# EAGLE board twiigs (EAGLE 7.5.0)
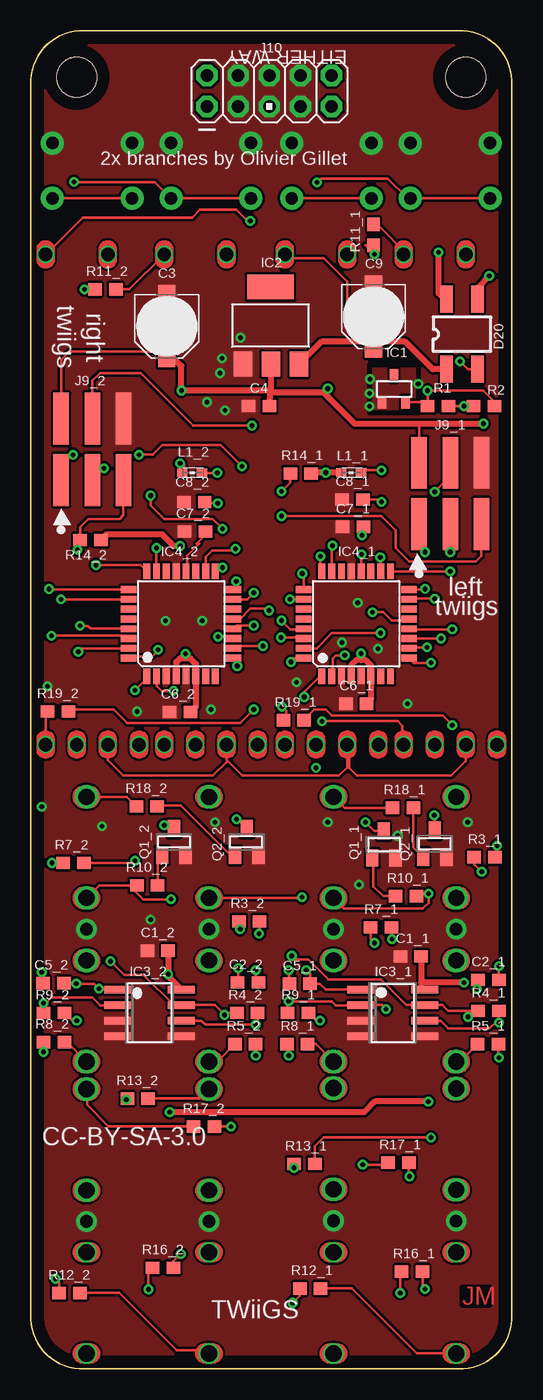
[diagram p0: board, top side]
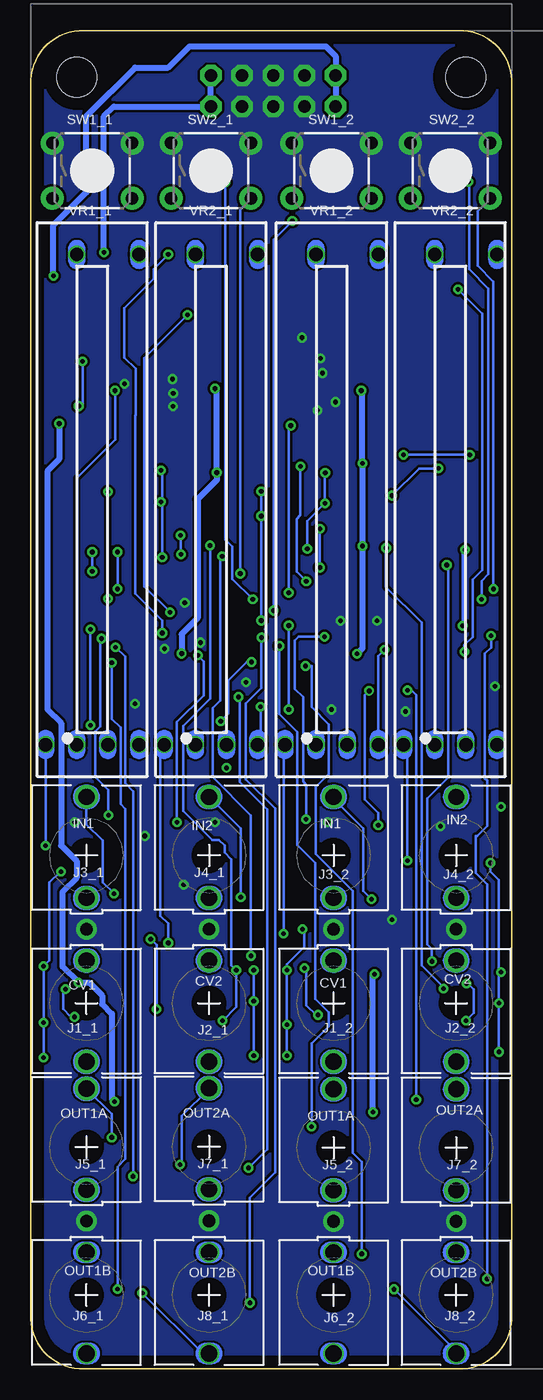
[diagram p1: board, bottom side, seen from below]

Size 39.27 x 109.22 mm. Coordinates in mm from the lower left corner, seen from the top.
Outline: 0,4.45 arc94 4.39,0 34.87,0 arc94 39.27,4.45 39.27,104.78 arc94 34.87,109.22 4.39,109.22 arc94 0,104.78 0,4.45
Copper layers (1*16): Top 0.035mm / dielectric 1.5mm / Bottom 0.035mm
Design rules "default *": minimum track width 10mil, minimum drill 0.61mm, track to track 8mil, track to pad 8mil, pad to pad 8mil, via to via 8mil, smd to smd 8mil, copper to edge 40mil, drill to drill 8mil, minimum pad ring 0mil, minimum via ring 8mil, stop-mask expansion 4mil, vias tented up to drill 15mil, thermal gap 10mil
Net classes: 0 default: width 0.203 mm, drill 0.3 mm, clearance 0.152 mm, clearance 0.152 mm to class 1, clearance 0.152 mm to class 2; 1 hipriority: width 0.203 mm, drill 0.3 mm, clearance 0.152 mm, clearance 0.152 mm to class 0, clearance 0.152 mm to class 2; 2 powa: width 0.381 mm, drill 0.3 mm, clearance 0.152 mm, clearance 0.152 mm to class 0, clearance 0.152 mm to class 1
Holes 3.25 mm at 3.76,105.41 35.51,105.41

## Footprints (pad centres in the part's own frame; a part is rotated, then mirrored left to right if it is on the bottom)
CAP_0603_C1_1 = smd 1.1 x 1: 1 -0.85,0; 2 0.85,0
CAP_0603_C1_2 = smd 1.1 x 1: 1 -0.85,0; 2 0.85,0
CAP_0603_C2_1 = smd 1.1 x 1: 1 -0.85,0; 2 0.85,0
CAP_0603_C2_2 = smd 1.1 x 1: 1 -0.85,0; 2 0.85,0
PANASONIC_C = smd 2.6 x 1.4: + 2.05,0; - -2.05,0
CAP_0603 = smd 1.1 x 1: 1 -0.85,0; 2 0.85,0
CAP_0603_C5_1 = smd 1.1 x 1: 1 -0.85,0; 2 0.85,0
CAP_0603_C5_2 = smd 1.1 x 1: 1 -0.85,0; 2 0.85,0
CAP_0603_C6_1 = smd 1.1 x 1: 1 -0.85,0; 2 0.85,0
CAP_0603_C6_2 = smd 1.1 x 1: 1 -0.85,0; 2 0.85,0
CAP_0603_C7_1 = smd 1.1 x 1: 1 -0.85,0; 2 0.85,0
CAP_0603_C7_2 = smd 1.1 x 1: 1 -0.85,0; 2 0.85,0
CAP_0603_C8_1 = smd 1.1 x 1: 1 -0.85,0; 2 0.85,0
CAP_0603_C8_2 = smd 1.1 x 1: 1 -0.85,0; 2 0.85,0
PANASONIC_C_C9 = smd 2.6 x 1.4: + 2.05,0; - -2.05,0
SOP-4/6.5x2.54 = smd 2.2 x 1: 1 -2.855,1.27; 2 -2.855,-1.27; 3 2.855,-1.27; 4 2.855,1.27
DBZ_R-PDSO-G3 = smd 0.7 x 1: 1 -0.95,-1.1; 2 0.95,-1.1; 3 0,1.1
SOT223 = smd 1.499 x 2.007: 1 -2.261,-3.15; 2 0.025,-3.15; 3 2.311,-3.15 | smd 3.81 x 2.007: 4 0,3.15
SO08 = smd 0.6 x 2.2: 1 -1.905,-2.6; 2 -0.635,-2.6; 3 0.635,-2.6; 4 1.905,-2.6; 5 1.905,2.6; 6 0.635,2.6; 7 -0.635,2.6; 8 -1.905,2.6
SO08_IC3_2 = smd 0.6 x 2.2: 1 -1.905,-2.6; 2 -0.635,-2.6; 3 0.635,-2.6; 4 1.905,-2.6; 5 1.905,2.6; 6 0.635,2.6; 7 -0.635,2.6; 8 -1.905,2.6
TQFP32-08 = smd 1.27 x 0.559: 1 -4.293,2.8; 2 -4.293,2; 3 -4.293,1.2; 4 -4.293,0.4; 5 -4.293,-0.4; 6 -4.293,-1.2; 7 -4.293,-2; 8 -4.293,-2.8; 17 4.293,-2.8; 18 4.293,-2; 19 4.293,-1.2; 20 4.293,-0.4; 21 4.293,0.4; 22 4.293,1.2; 23 4.293,2; 24 4.293,2.8 | smd 0.559 x 1.27: 9 -2.8,-4.293; 10 -2,-4.293; 11 -1.2,-4.293; 12 -0.4,-4.293; 13 0.4,-4.293; 14 1.2,-4.293; 15 2,-4.293; 16 2.8,-4.293; 25 2.8,4.293; 26 2,4.293; 27 1.2,4.293; 28 0.4,4.293; 29 -0.4,4.293; 30 -1.2,4.293; 31 -2,4.293; 32 -2.8,4.293
TQFP32-08_IC4_2 = smd 1.27 x 0.559: 1 -4.293,2.8; 2 -4.293,2; 3 -4.293,1.2; 4 -4.293,0.4; 5 -4.293,-0.4; 6 -4.293,-1.2; 7 -4.293,-2; 8 -4.293,-2.8; 17 4.293,-2.8; 18 4.293,-2; 19 4.293,-1.2; 20 4.293,-0.4; 21 4.293,0.4; 22 4.293,1.2; 23 4.293,2; 24 4.293,2.8 | smd 0.559 x 1.27: 9 -2.8,-4.293; 10 -2,-4.293; 11 -1.2,-4.293; 12 -0.4,-4.293; 13 0.4,-4.293; 14 1.2,-4.293; 15 2,-4.293; 16 2.8,-4.293; 25 2.8,4.293; 26 2,4.293; 27 1.2,4.293; 28 0.4,4.293; 29 -0.4,4.293; 30 -1.2,4.293; 31 -2,4.293; 32 -2.8,4.293
Thonkiconn = drill 1.321 pad 1.905: 1 0,3.48; 2 0,-4.775 | drill 1.016 pad 1.651: 3 0,6.02
Thonkiconn_J1_2 = drill 1.321 pad 1.905: 1 0,3.48; 2 0,-4.775 | drill 1.016 pad 1.651: 3 0,6.02
Thonkiconn_J2_1 = drill 1.321 pad 1.905: 1 0,3.48; 2 0,-4.775 | drill 1.016 pad 1.651: 3 0,6.02
Thonkiconn_J2_2 = drill 1.321 pad 1.905: 1 0,3.48; 2 0,-4.775 | drill 1.016 pad 1.651: 3 0,6.02
Thonkiconn_J3_1 = drill 1.321 pad 1.905: 1 0,3.48; 2 0,-4.775 | drill 1.016 pad 1.651: 3 0,6.02
Thonkiconn_J3_2 = drill 1.321 pad 1.905: 1 0,3.48; 2 0,-4.775 | drill 1.016 pad 1.651: 3 0,6.02
Thonkiconn_J4_1 = drill 1.321 pad 1.905: 1 0,3.48; 2 0,-4.775 | drill 1.016 pad 1.651: 3 0,6.02
Thonkiconn_J4_2 = drill 1.321 pad 1.905: 1 0,3.48; 2 0,-4.775 | drill 1.016 pad 1.651: 3 0,6.02
Thonkiconn_J5_1 = drill 1.321 pad 1.905: 1 0,3.48; 2 0,-4.775 | drill 1.016 pad 1.651: 3 0,6.02
Thonkiconn_J5_2 = drill 1.321 pad 1.905: 1 0,3.48; 2 0,-4.775 | drill 1.016 pad 1.651: 3 0,6.02
Thonkiconn_J6_1 = drill 1.321 pad 1.651: 1 0,3.48; 2 0,-4.775 | drill 1.016 pad 1.651: 3 0,6.02
Thonkiconn_J6_2 = drill 1.321 pad 1.651: 1 0,3.48; 2 0,-4.775 | drill 1.016 pad 1.651: 3 0,6.02
Thonkiconn_J7_1 = drill 1.321 pad 1.905: 1 0,3.48; 2 0,-4.775 | drill 1.016 pad 1.651: 3 0,6.02
Thonkiconn_J7_2 = drill 1.321 pad 1.905: 1 0,3.48; 2 0,-4.775 | drill 1.016 pad 1.651: 3 0,6.02
Thonkiconn_J8_1 = drill 1.321 pad 1.651: 1 0,3.48; 2 0,-4.775 | drill 1.016 pad 1.651: 3 0,6.02
Thonkiconn_J8_2 = drill 1.321 pad 1.651: 1 0,3.48; 2 0,-4.775 | drill 1.016 pad 1.651: 3 0,6.02
HDR-2x3S/2.54x2.54/Sh15x11 = smd 1.27 x 4.24: 1 -2.54,-2.505; 2 -2.54,2.505; 3 0,-2.505; 4 0,2.505; 5 2.54,-2.505; 6 2.54,2.505
HDR-2x3S/2.54x2.54/Sh15x11_J9_2 = smd 1.27 x 4.24: 1 -2.54,-2.505; 2 -2.54,2.505; 3 0,-2.505; 4 0,2.505; 5 2.54,-2.505; 6 2.54,2.505
AVR_ICSP = drill 1.016 pad 1.737 octagon: 1 -1.27,5.08; 2 1.27,5.08; 3 -1.27,2.54; 4 1.27,2.54; 5 -1.27,0; 6 1.27,0; 7 -1.27,-2.54; 8 1.27,-2.54; 9 -1.27,-5.08; 10 1.27,-5.08
0603 = smd 0.85 x 0.7: 1 -0.9,0; 2 0.7,0
0603_L1_2 = smd 0.85 x 0.7: 1 -0.9,0; 2 0.7,0
SOT23-BEC = smd 1 x 1.4: B -0.95,-1.1; C 0,1.1; E 0.95,-1.1
SOT23-BEC_Q1_2 = smd 1 x 1.4: B -0.95,-1.1; C 0,1.1; E 0.95,-1.1
SOT23-BEC_Q2_1 = smd 1 x 1.4: B -0.95,-1.1; C 0,1.1; E 0.95,-1.1
SOT23-BEC_Q2_2 = smd 1 x 1.4: B -0.95,-1.1; C 0,1.1; E 0.95,-1.1
RES_0603 = smd 1.1 x 1: 1 -0.85,0; 2 0.85,0
RES_0603_R2 = smd 1.1 x 1: 1 -0.85,0; 2 0.85,0
RES_0603_R3_1 = smd 1.1 x 1: 1 -0.85,0; 2 0.85,0
RES_0603_R3_2 = smd 1.1 x 1: 1 -0.85,0; 2 0.85,0
RES_0603_R4_1 = smd 1.1 x 1: 1 -0.85,0; 2 0.85,0
RES_0603_R4_2 = smd 1.1 x 1: 1 -0.85,0; 2 0.85,0
RES_0603_R5_1 = smd 1.1 x 1: 1 -0.85,0; 2 0.85,0
RES_0603_R5_2 = smd 1.1 x 1: 1 -0.85,0; 2 0.85,0
RES_0603_R7_1 = smd 1.1 x 1: 1 -0.85,0; 2 0.85,0
RES_0603_R7_2 = smd 1.1 x 1: 1 -0.85,0; 2 0.85,0
RES_0603_R8_1 = smd 1.1 x 1: 1 -0.85,0; 2 0.85,0
RES_0603_R8_2 = smd 1.1 x 1: 1 -0.85,0; 2 0.85,0
RES_0603_R9_1 = smd 1.1 x 1: 1 -0.85,0; 2 0.85,0
RES_0603_R9_2 = smd 1.1 x 1: 1 -0.85,0; 2 0.85,0
RES_0603_R10_1 = smd 1.1 x 1: 1 -0.85,0; 2 0.85,0
RES_0603_R10_2 = smd 1.1 x 1: 1 -0.85,0; 2 0.85,0
RES_0603_R11_1 = smd 1.1 x 1: 1 -0.85,0; 2 0.85,0
RES_0603_R11_2 = smd 1.1 x 1: 1 -0.85,0; 2 0.85,0
RES_0603_R12_1 = smd 1.1 x 1: 1 -0.85,0; 2 0.85,0
RES_0603_R12_2 = smd 1.1 x 1: 1 -0.85,0; 2 0.85,0
RES_0603_R13_1 = smd 1.1 x 1: 1 -0.85,0; 2 0.85,0
RES_0603_R13_2 = smd 1.1 x 1: 1 -0.85,0; 2 0.85,0
RES_0603_R14_1 = smd 1.1 x 1: 1 -0.85,0; 2 0.85,0
RES_0603_R14_2 = smd 1.1 x 1: 1 -0.85,0; 2 0.85,0
RES_0603_R16_1 = smd 1.1 x 1: 1 -0.85,0; 2 0.85,0
RES_0603_R16_2 = smd 1.1 x 1: 1 -0.85,0; 2 0.85,0
RES_0603_R17_1 = smd 1.1 x 1: 1 -0.85,0; 2 0.85,0
RES_0603_R17_2 = smd 1.1 x 1: 1 -0.85,0; 2 0.85,0
RES_0603_R18_1 = smd 1.1 x 1: 1 -0.85,0; 2 0.85,0
RES_0603_R18_2 = smd 1.1 x 1: 1 -0.85,0; 2 0.85,0
RES_0603_R19_1 = smd 1.1 x 1: 1 -0.85,0; 2 0.85,0
RES_0603_R19_2 = smd 1.1 x 1: 1 -0.85,0; 2 0.85,0
TACTILE-PTH = drill 1.016 pad 1.88: 1 -3.251,2.261; 2 3.251,2.261; 3 -3.251,-2.261; 4 3.251,-2.261
TACTILE-PTH_SW1_2 = drill 1.016 pad 1.88: 1 -3.251,2.261; 2 3.251,2.261; 3 -3.251,-2.261; 4 3.251,-2.261
TACTILE-PTH_SW2_1 = drill 1.016 pad 1.88: 1 -3.251,2.261; 2 3.251,2.261; 3 -3.251,-2.261; 4 3.251,-2.261
TACTILE-PTH_SW2_2 = drill 1.016 pad 1.88: 1 -3.251,2.261; 2 3.251,2.261; 3 -3.251,-2.261; 4 3.251,-2.261
BOURNS_PTL_30mm = drill 1.092 pad 1.397: 1 -20,1.27; 2 -20,3.81; 3 20,1.27; 4 -20,-1.27; 5 20,-3.81; 6 -20,-3.81
BOURNS_PTL_30mm_VR1_2 = drill 1.092 pad 1.397: 1 -20,1.27; 2 -20,3.81; 3 20,1.27; 4 -20,-1.27; 5 20,-3.81; 6 -20,-3.81
BOURNS_PTL_30mm_VR2_1 = drill 1.092 pad 1.397: 1 -20,1.27; 2 -20,3.81; 3 20,1.27; 4 -20,-1.27; 5 20,-3.81; 6 -20,-3.81
BOURNS_PTL_30mm_VR2_2 = drill 1.092 pad 1.397: 1 -20,1.27; 2 -20,3.81; 3 20,1.27; 4 -20,-1.27; 5 20,-3.81; 6 -20,-3.81

## Placement (x,y rotation side)
C1_1  100n  [CAP_0603_C1_1]  31.01,33.66 180 top
C1_2  100n  [CAP_0603_C1_2]  10.37,34.13 180 top
C2_1  1n  [CAP_0603_C2_1]  37.36,31.75 180 top
C2_2  1n  [CAP_0603_C2_2]  17.73,31.54 180 top
C3  22u  [PANASONIC_C]  11.11,85.09 270 top
C4  100n  [CAP_0603]  18.63,78.57 180 top
C5_1  1n  [CAP_0603_C5_1]  21.96,31.43 0 top
C5_2  1n  [CAP_0603_C5_2]  1.85,31.49 0 top
C6_1  100n  [CAP_0603_C6_1]  26.56,54.29 180 top
C6_2  100n  [CAP_0603_C6_2]  12.17,53.6 180 top
C7_1  100n  [CAP_0603_C7_1]  26.3,68.72 180 top
C7_2  100n  [CAP_0603_C7_2]  13.42,68.34 180 top
C8_1  100n  [CAP_0603_C8_1]  26.26,70.96 180 top
C8_2  100n  [CAP_0603_C8_2]  13.35,70.74 180 top
C9  22u  [PANASONIC_C_C9]  27.98,85.88 270 top
D20  MB1S  [SOP-4/6.5x2.54]  35.19,84.44 90 top
IC1  LM4040 5.0V  [DBZ_R-PDSO-G3]  29.63,79.99 0 top
IC2  LM1117-5.0  [SOT223]  19.57,85.15 0 top
IC3_1  MCP6002  [SO08]  29.54,29.05 270 top
IC3_2  MCP6002  [SO08_IC3_2]  9.69,29.05 270 top
IC4_1  ATMEGA88PA-AU  [TQFP32-08]  26.56,60.81 90 top
IC4_2  ATMEGA88PA-AU  [TQFP32-08_IC4_2]  12.27,60.81 90 top
J1_1  CV1  [Thonkiconn]  34.72,29.84 0 bottom
J1_2  CV1  [Thonkiconn_J1_2]  14.55,29.84 0 bottom
J2_1  CV2  [Thonkiconn_J2_1]  24.71,29.84 0 bottom
J2_2  CV2  [Thonkiconn_J2_2]  4.55,29.84 0 bottom
J3_1  IN1  [Thonkiconn_J3_1]  34.72,41.91 180 bottom
J3_2  IN1  [Thonkiconn_J3_2]  14.55,41.91 180 bottom
J4_1  IN2  [Thonkiconn_J4_1]  24.71,41.91 180 bottom
J4_2  IN2  [Thonkiconn_J4_2]  4.55,41.91 180 bottom
J5_1  OUT1A  [Thonkiconn_J5_1]  34.71,18.1 180 bottom
J5_2  OUT1A  [Thonkiconn_J5_2]  14.55,18.05 180 bottom
J6_1  OUT1B  [Thonkiconn_J6_1]  34.71,6.03 0 bottom
J6_2  OUT1B  [Thonkiconn_J6_2]  14.55,6.03 0 bottom
J7_1  OUT2A  [Thonkiconn_J7_1]  24.71,18.14 180 bottom
J7_2  OUT2A  [Thonkiconn_J7_2]  4.55,18.05 180 bottom
J8_1  OUT2B  [Thonkiconn_J8_1]  24.71,6.03 0 bottom
J8_2  OUT2B  [Thonkiconn_J8_2]  4.55,6.03 0 bottom
J9_1  [HDR-2x3S/2.54x2.54/Sh15x11]  34.24,71.44 0 top
J9_2  [HDR-2x3S/2.54x2.54/Sh15x11_J9_2]  5.03,75.05 0 top
J10  M05X2PTH  [AVR_ICSP]  19.48,104.3 90 top
L1_1  [0603]  26.24,73.15 0 top
L1_2  [0603_L1_2]  13.27,73.14 0 top
Q1_1  MMBT3904  [SOT23-BEC]  28.82,42.79 0 top
Q1_2  MMBT3904  [SOT23-BEC_Q1_2]  11.69,43.01 0 top
Q2_1  MMBT3904  [SOT23-BEC_Q2_1]  32.97,42.86 0 top
Q2_2  MMBT3904  [SOT23-BEC_Q2_2]  17.63,43.01 0 top
R1  3.3k  [RES_0603]  33.23,78.57 180 top
R2  3.3k  [RES_0603_R2]  36.99,78.57 0 top
R3_1  100k  [RES_0603_R3_1]  37.04,41.75 180 top
R3_2  100k  [RES_0603_R3_2]  17.83,36.51 180 top
R4_1  100k  [RES_0603_R4_1]  37.36,29.21 180 top
R4_2  100k  [RES_0603_R4_2]  17.67,29.05 180 top
R5_1  100k  [RES_0603_R5_1]  37.31,26.51 0 top
R5_2  100k  [RES_0603_R5_2]  17.51,26.51 0 top
R7_1  100k  [RES_0603_R7_1]  28.58,36.04 0 top
R7_2  100k  [RES_0603_R7_2]  3.49,41.29 180 top
R8_1  100k  [RES_0603_R8_1]  21.75,26.51 180 top
R8_2  100k  [RES_0603_R8_2]  1.91,26.67 180 top
R9_1  100k  [RES_0603_R9_1]  21.8,29.05 0 top
R9_2  100k  [RES_0603_R9_2]  1.91,29.05 0 top
R10_1  100k  [RES_0603_R10_1]  30.64,38.58 0 top
R10_2  100k  [RES_0603_R10_2]  9.51,39.47 180 top
R11_1  220  [RES_0603_R11_1]  27.96,92.54 90 top
R11_2  220  [RES_0603_R11_2]  6.1,88.11 0 top
R12_1  1.0k  [RES_0603_R12_1]  22.81,6.57 0 top
R12_2  1.0k  [RES_0603_R12_2]  3.18,6.19 0 top
R13_1  1.0k  [RES_0603_R13_1]  22.33,16.73 0 top
R13_2  1.0k  [RES_0603_R13_2]  8.74,22.06 0 top
R14_1  10k  [RES_0603_R14_1]  22.04,73.08 0 top
R14_2  10k  [RES_0603_R14_2]  4.88,67.65 0 top
R16_1  1.0k  [RES_0603_R16_1]  31.12,7.94 180 top
R16_2  1.0k  [RES_0603_R16_2]  10.8,8.26 180 top
R17_1  1.0k  [RES_0603_R17_1]  30.01,16.83 180 top
R17_2  1.0k  [RES_0603_R17_2]  14.15,19.78 180 top
R18_1  100k  [RES_0603_R18_1]  30.37,45.79 180 top
R18_2  100k  [RES_0603_R18_2]  9.47,45.9 180 top
R19_1  220  [RES_0603_R19_1]  21.47,52.93 0 top
R19_2  220  [RES_0603_R19_2]  2.23,53.65 0 top
SW1_1  [TACTILE-PTH]  34.24,97.79 0 bottom
SW1_2  [TACTILE-PTH_SW1_2]  14.71,97.79 0 bottom
SW2_1  [TACTILE-PTH_SW2_1]  24.56,97.79 0 bottom
SW2_2  [TACTILE-PTH_SW2_2]  5.03,97.79 0 bottom
VR1_1  [BOURNS_PTL_30mm]  34.24,70.95 90 bottom
VR1_2  [BOURNS_PTL_30mm_VR1_2]  14.71,70.95 90 bottom
VR2_1  [BOURNS_PTL_30mm_VR2_1]  24.55,70.95 90 bottom
VR2_2  [BOURNS_PTL_30mm_VR2_2]  5.03,70.95 90 bottom

## Library data of the parts
C1_1 = common; HIERARCHY: Block1 C1
C1_2 = common; HIERARCHY: Block2 C1
C2_1 = common; HIERARCHY: Block1 C2
C2_2 = common; HIERARCHY: Block2 C2
C3 C4 C9 D20 IC1 IC2 J10 R1 R2 = common
C5_1 = common; HIERARCHY: Block1 C5
C5_2 = common; HIERARCHY: Block2 C5
C6_1 = common; HIERARCHY: Block1 C6
C6_2 = common; HIERARCHY: Block2 C6
C7_1 = common; HIERARCHY: Block1 C7
C7_2 = common; HIERARCHY: Block2 C7
C8_1 = common; HIERARCHY: Block1 C8
C8_2 = common; HIERARCHY: Block2 C8
IC3_1 = common; HIERARCHY: Block1 IC3
IC3_2 = common; HIERARCHY: Block2 IC3
IC4_1 = common; HIERARCHY: Block1 IC4
IC4_2 = common; HIERARCHY: Block2 IC4
J1_1 = common; HIERARCHY: Block1 J1
J1_2 = common; HIERARCHY: Block2 J1
J2_1 = common; HIERARCHY: Block1 J2
J2_2 = common; HIERARCHY: Block2 J2
J3_1 = common; HIERARCHY: Block1 J3
J3_2 = common; HIERARCHY: Block2 J3
J4_1 = common; HIERARCHY: Block1 J4
J4_2 = common; HIERARCHY: Block2 J4
J5_1 = common; HIERARCHY: Block1 J5
J5_2 = common; HIERARCHY: Block2 J5
J6_1 = common; HIERARCHY: Block1 J6
J6_2 = common; HIERARCHY: Block2 J6
J7_1 = common; HIERARCHY: Block1 J7
J7_2 = common; HIERARCHY: Block2 J7
J8_1 = common; HIERARCHY: Block1 J8
J8_2 = common; HIERARCHY: Block2 J8
J9_1 = common; HIERARCHY: Block1 J9
J9_2 = common; HIERARCHY: Block2 J9
L1_1 = common; HIERARCHY: Block1 L1
L1_2 = common; HIERARCHY: Block2 L1
Q1_1 = common; HIERARCHY: Block1 Q1
Q1_2 = common; HIERARCHY: Block2 Q1
Q2_1 = common; HIERARCHY: Block1 Q2
Q2_2 = common; HIERARCHY: Block2 Q2
R3_1 = common; HIERARCHY: Block1 R3
R3_2 = common; HIERARCHY: Block2 R3
R4_1 = common; HIERARCHY: Block1 R4
R4_2 = common; HIERARCHY: Block2 R4
R5_1 = common; HIERARCHY: Block1 R5
R5_2 = common; HIERARCHY: Block2 R5
R7_1 = common; HIERARCHY: Block1 R7
R7_2 = common; HIERARCHY: Block2 R7
R8_1 = common; HIERARCHY: Block1 R8
R8_2 = common; HIERARCHY: Block2 R8
R9_1 = common; HIERARCHY: Block1 R9
R9_2 = common; HIERARCHY: Block2 R9
R10_1 = common; HIERARCHY: Block1 R10
R10_2 = common; HIERARCHY: Block2 R10
R11_1 = common; HIERARCHY: Block1 R11
R11_2 = common; HIERARCHY: Block2 R11
R12_1 = common; HIERARCHY: Block1 R12
R12_2 = common; HIERARCHY: Block2 R12
R13_1 = common; HIERARCHY: Block1 R13
R13_2 = common; HIERARCHY: Block2 R13
R14_1 = common; HIERARCHY: Block1 R14
R14_2 = common; HIERARCHY: Block2 R14
R16_1 = common; HIERARCHY: Block1 R16
R16_2 = common; HIERARCHY: Block2 R16
R17_1 = common; HIERARCHY: Block1 R17
R17_2 = common; HIERARCHY: Block2 R17
R18_1 = common; HIERARCHY: Block1 R18
R18_2 = common; HIERARCHY: Block2 R18
R19_1 = common; HIERARCHY: Block1 R19
R19_2 = common; HIERARCHY: Block2 R19
SW1_1 = common; HIERARCHY: Block1 SW1
SW1_2 = common; HIERARCHY: Block2 SW1
SW2_1 = common; HIERARCHY: Block1 SW2
SW2_2 = common; HIERARCHY: Block2 SW2
VR1_1 = common; DATASHEET: http://www.bourns.com/data/global/pdfs/bourns_trimpot_catalog.pdf; HIERARCHY: Block1 VR1; MANUFACTURER: Bourns
VR1_2 = common; DATASHEET: http://www.bourns.com/data/global/pdfs/bourns_trimpot_catalog.pdf; HIERARCHY: Block2 VR1; MANUFACTURER: Bourns
VR2_1 = common; DATASHEET: http://www.bourns.com/data/global/pdfs/bourns_trimpot_catalog.pdf; HIERARCHY: Block1 VR2; MANUFACTURER: Bourns
VR2_2 = common; DATASHEET: http://www.bourns.com/data/global/pdfs/bourns_trimpot_catalog.pdf; HIERARCHY: Block2 VR2; MANUFACTURER: Bourns

## Nets
+5V: C1_1.1 C1_2.1 C3.+ C4.1 C6_1.1 C6_2.1 IC2.2 IC3_1.8 IC3_2.8 IC4_1.4 IC4_1.6 IC4_2.4 IC4_2.6 J9_1.2 J9_2.2 L1_1.1 L1_2.1 R14_1.2 R14_2.2
AREF_1: C7_1.1 IC4_1.20
AREF_2: C7_2.1 IC4_2.20
GATE1_IN_1: J3_1.2 J4_1.1 R10_1.2
GATE1_IN_2: J3_2.2 J4_2.1 R10_2.2
GATE2_IN_2: J4_2.2 R18_2.2
GND: C1_1.2 C1_2.2 C3.- C4.2 C6_1.2 C6_2.2 C7_1.2 C7_2.2 C8_1.2 C8_2.2 C9.- IC1.1 IC2.1 IC3_1.3 IC3_1.4 IC3_1.5 IC3_2.3 IC3_2.4 IC3_2.5 IC4_1.3 IC4_1.5 IC4_1.21 IC4_2.3 IC4_2.5 IC4_2.21 J1_1.3 J1_2.3 J2_1.3 J2_2.3 J3_1.1 J3_1.3 J3_2.3 J4_1.3 J4_2.3 J5_1.3 J5_2.3 J6_1.3 J6_2.3 J7_1.3 J7_2.3 J8_1.3 J8_2.3 J9_1.6 J9_2.6 J10.3 J10.4 J10.5 J10.6 J10.7 J10.8 Q1_1.E Q1_2.E Q2_1.E Q2_2.E SW1_1.1 SW1_1.2 SW1_2.1 SW1_2.2 SW2_1.1 SW2_1.2 SW2_2.1 SW2_2.2 VR1_1.3 VR1_2.3 VR2_1.3 VR2_2.3
IN1_1: IC4_1.2 Q1_1.C
IN1_2: IC4_2.2 Q1_2.C
IN2_1: IC4_1.11 Q2_1.C
IN2_2: IC4_2.11 Q2_2.C
MISO_1: IC4_1.16 J9_1.1
MISO_2: IC4_2.16 J9_2.1
MOSI_1: IC4_1.15 J9_1.4
MOSI_2: IC4_2.15 J9_2.4
N$1_1: Q1_1.B R10_1.1
N$1_2: Q1_2.B R10_2.1
N$2_1: Q2_1.B R18_1.1
N$2_2: Q2_2.B R18_2.1
N$4_1: C5_1.1 IC3_1.2 R7_1.2 R8_1.2 R9_1.1
N$4_2: C5_2.1 IC3_2.2 R7_2.2 R8_2.2 R9_2.1
N$6_1: J8_1.2 R16_1.2
N$6_2: J8_2.2 R16_2.2
N$8_1: R7_1.1 VR2_1.2
N$8_2: R7_2.1 VR2_2.2
N$9_1: R3_1.1 VR1_1.2
N$9_2: R3_2.1 VR1_2.2
N$10_1: J1_1.2 R5_1.1
N$10_2: J1_2.2 R5_2.1
N$11_1: J2_1.2 R8_1.1
N$11_2: J2_2.2 R8_2.1
N$13_1: IC4_1.31 R11_1.1
N$13_2: IC4_2.31 R11_2.1
N$14_1: R11_1.2 VR1_1.5
N$14_2: R11_2.2 VR1_2.5
N$15_1: IC4_1.32 VR1_1.6
N$15_2: IC4_2.32 VR1_2.6
N$16_1: IC4_1.13 VR2_1.5
N$16_2: IC4_2.13 VR2_2.5
N$17_1: R19_1.1 VR2_1.6
N$17_2: R19_2.1 VR2_2.6
N$18_1: IC4_1.12 R19_1.2
N$18_2: IC4_2.12 R19_2.2
N$29_1: C2_1.1 IC3_1.6 R3_1.2 R4_1.1 R5_1.2
N$29_2: C2_2.1 IC3_2.6 R3_2.2 R4_2.1 R5_2.2
N$34_1: J5_1.2 R13_1.2
N$34_2: J5_2.2 R13_2.2
N$35_1: J6_1.2 R12_1.2
N$35_2: J6_2.2 R12_2.2
N$36_1: J7_1.2 R17_1.2
N$36_2: J7_2.2 R17_2.2
N$39_1: C8_1.1 IC4_1.18 L1_1.2
N$39_2: C8_2.1 IC4_2.18 L1_2.2
Net_0: D20.3 J10.1 J10.2
Net_43: J3_2.1 J4_1.2 R18_1.2
Net_44: D20.4 J10.9 J10.10
OUT1_A_1: IC4_1.1 R13_1.1
OUT1_A_2: IC4_2.1 R13_2.1
OUT1_B_1: IC4_1.30 R12_1.1
OUT1_B_2: IC4_2.30 R12_2.1
OUT2_A_1: IC4_1.10 R17_1.1
OUT2_A_2: IC4_2.10 R17_2.1
OUT2_B_1: IC4_1.9 R16_1.1
OUT2_B_2: IC4_2.9 R16_2.1
P1_CV_1: C2_1.2 IC3_1.7 IC4_1.24 R4_1.2
P1_CV_2: C2_2.2 IC3_2.7 IC4_2.24 R4_2.2
P2_CV_1: C5_1.2 IC3_1.1 IC4_1.23 R9_1.2
P2_CV_2: C5_2.2 IC3_2.1 IC4_2.23 R9_2.2
REF_-5: IC1.2 R1.2 R2.2 VR1_1.1 VR1_2.1 VR2_1.1 VR2_2.1
RESET_1: IC4_1.29 J9_1.5 R14_1.1
RESET_2: IC4_2.29 J9_2.5 R14_2.1
SCK_1: IC4_1.17 J9_1.3
SCK_2: IC4_2.17 J9_2.3
SW1_1: IC4_1.26 SW1_1.3 SW1_1.4
SW1_2: IC4_2.26 SW1_2.3 SW1_2.4
SW2_1: IC4_1.25 SW2_1.3 SW2_1.4
SW2_2: IC4_2.25 SW2_2.3 SW2_2.4
VCC: C9.+ D20.1 IC2.3
VEE: D20.2 R1.1 R2.1

## Tracks (layer width: path | path; a pad name or v marks a point on that pad's centre or on a via)
+5V  (via drill 0.38 pad 0.76)
  Top 0.203: J9_1.2 31.7,77.14 | C3.+ 3.15,83.04 2.49,82.38 J9_2.2 | J9_2.2
  Top 0.508: C1_1.1 31.86,31.53 | 31.86,31.53 31.86,31.23 IC3_1.8 | C1_2.1 v11.22,32.22 11.22,32.03 IC3_2.8 | C6_1.1 27.76,54.64 IC4_1.6 27.76,57.44 27.35,57.85 26.95,57.85 | 26.95,57.85 26.55,57.85 26.18,57.48 26.18,56.53 IC4_1.4 | C6_2.1 13.47,54.05 IC4_2.6 13.47,57.54 13.03,57.98 12.63,57.98 | 12.63,57.98 12.19,57.98 11.88,57.67 IC4_2.4 | IC2.2 19.6,79.84 | 19.6,79.84 v12.29,79.84 12.29,81.86 C3.+ | L1_1.1 v24.08,73.15 22.96,73.15 R14_1.2 | 19.6,79.84 19.48,79.72 23.88,79.72 | 23.88,79.72 26.46,77.14 31.7,77.14 v36.94,77.14 | v35.36,31.53 31.86,31.53 | v24.24,80 24.24,79.72 23.88,79.72 | v32.44,21.82 28.08,21.82 27.21,20.95 v11.35,20.95 | L1_2.1 12.37,73.72 v12.2,73.89 | v12.63,58.38 12.63,57.98 | v26.95,58.39 26.95,57.85 | v12.2,67.15 11.69,67.15 10.75,68.1 6.18,68.1 R14_2.2 | C4.1 19.6,79.84
  Bottom 0.508: v36.94,77.14 36.94,74.23 37.91,73.26 37.91,53.84 36.78,52.7 36.78,42.72 35.51,41.45 35.51,40.09 36.67,38.92 36.67,32.84 v35.36,31.53 34.5,31.53 33.44,30.48 33.44,29.78 32.64,28.97 32.64,22.02 v32.44,21.82 | v24.24,80 24.08,80 v24.08,73.15 24.08,72.55 25.64,70.98 25.64,61.27 26.95,59.97 v26.95,58.39 | v11.35,20.95 11.35,32.09 v11.22,32.22 | v12.29,79.84 12.2,79.75 v12.2,73.89 v12.2,67.15 12.2,58.81 v12.63,58.38
  pour Top (isolate 0.381, hatched): 14.68,94 14.68,86 17.72,86.08 19.08,83.32 20.09,83.3 21.26,85.99 24.9,86 24.75,94
AREF_1  (via drill 0.38 pad 0.76)
  Top 0.203: IC4_1.20 26.96,66.44 v27,66.49 | v27.03,68.04 27.03,68.83 C7_1.1
  Bottom 0.203: v27,66.49 27,68.01 v27.03,68.04
AREF_2
  Top 0.203: C7_2.1 14.27,68.08 13.55,67.36 13.76,67.36 12.77,66.37 12.77,65.19 IC4_2.20
GATE1_IN_1  (via drill 0.38 pad 0.76)
  Top 0.203: R10_1.2 31.69,38.79 v32.46,38.79 32.46,38.04 32.01,37.59 25.56,37.59 J4_1.1
  Bottom 0.203: J3_1.2 34.72,44.45 33.39,43.12 33.39,39.71 v32.46,38.79
GATE1_IN_2  (via drill 0.38 pad 0.76)
  Top 0.203: v11.45,38.32 9.2,38.32 8.06,39.47 R10_2.2 5.59,39.47 J4_2.1
  Bottom 0.203: J3_2.2 14.55,46.5 12.15,44.1 12.15,39.02 v11.45,38.32
GATE2_IN_2
  Top 0.203: J4_2.2 7.84,46.69 R18_2.2
GND  (via drill 0.38 pad 0.76)
  other vias: 31.62,80.39 14,61.06 11,61.06 26.69,62.53 28.34,58.78 25.4,59.28 27.69,80.78 27.64,79.61 27.65,78.56 14.39,78.91 15.85,78.23 15.62,82.46 17.13,84.16 15.46,81.26 0.9,45.87 1.38,55.72 8.68,53.65 15.03,44.6 24.24,44.6 26.78,39.52 35.67,44.6 30.75,54.29 21.7,56.03 14.71,53.81 9.79,36.67 29.95,43.49 5.82,44.29
  pour Bottom (isolate 0.178): 0.52,4.46 0.57,3.66 0.77,2.91 1.12,2.23 1.6,1.63 2.19,1.14 2.87,0.79 3.61,0.58 4.41,0.52 34.86,0.52 35.66,0.58 36.4,0.79 37.08,1.14 37.67,1.63 38.15,2.23 38.5,2.91 38.7,3.66 38.75,4.46 38.75,104.76 38.7,105.56 38.5,106.31 38.15,106.99 37.67,107.59 37.08,108.08 36.4,108.43 35.66,108.64 34.86,108.7 4.41,108.7 3.61,108.64 2.87,108.43 2.19,108.08 1.6,107.59 1.12,106.99 0.77,106.31 0.57,105.56 0.52,104.76
  pour Top (isolate 0.178): 0.52,4.46 0.57,3.66 0.77,2.91 1.12,2.23 1.6,1.63 2.19,1.14 2.87,0.79 3.61,0.58 4.41,0.52 34.86,0.52 35.66,0.58 36.4,0.79 37.08,1.14 37.67,1.63 38.15,2.23 38.5,2.91 38.7,3.66 38.75,4.46 38.75,104.76 38.7,105.56 38.5,106.31 38.15,106.99 37.67,107.59 37.08,108.08 36.4,108.43 35.66,108.64 34.86,108.7 4.41,108.7 3.61,108.64 2.87,108.43 2.19,108.08 1.6,107.59 1.12,106.99 0.77,106.31 0.57,105.56 0.52,104.76
IN1_1  (via drill 0.38 pad 0.76)
  Top 0.203: Q1_1.C 28.04,43.9 v27.33,44.61 | v25.63,58.23 24.91,58.23 24.64,57.96 24.64,56.6 IC4_1.2
  Bottom 0.203: v27.33,44.61 27.33,52.78 25.14,54.97 25.14,57.74 v25.63,58.23
IN1_2  (via drill 0.38 pad 0.76)
  Top 0.203: Q1_2.C 11.17,44.11 v10.9,44.38 | v11.65,55.33 10.69,55.33 10.3,55.72 10.3,56.49 IC4_2.2
  Bottom 0.203: v10.9,44.38 10.9,45.37 11.99,46.46 11.99,54.98 v11.65,55.33
IN2_1  (via drill 0.38 pad 0.76)
  Top 0.203: Q2_1.C 32.97,45.14 v32.92,45.19 | v33.49,59.61 IC4_1.11
  Bottom 0.203: v32.92,45.19 32.92,47.25 33.98,48.31 33.98,52 33.57,52.41 33.57,59.52 v33.49,59.61
IN2_2  (via drill 0.38 pad 0.76)
  Top 0.203: Q2_2.C 17.55,44.11 v16.8,44.86 | v15.29,59.74 16.43,59.74 IC4_2.11
  Bottom 0.203: v16.8,44.86 16.8,47.67 17.05,47.92 17.05,54.84 17.71,55.5 17.71,59.44 17.39,59.76 15.3,59.76 v15.29,59.74
MISO_1  (via drill 0.38 pad 0.76)
  Top 0.203: IC4_1.16 32.13,63.61 v32.17,63.65 | v32.17,66.67 32.17,68.46 J9_1.1
  Bottom 0.203: v32.17,63.65 v32.17,66.67
MISO_2  (via drill 0.38 pad 0.76)
  Top 0.203: J9_2.1 2.49,73.65 v3.44,74.61 | v8.84,74.61 9.95,74.61 10.75,75.4 15.51,75.4 v17.25,73.65 | v16.78,64.29 16.78,63.82 IC4_2.16
  Bottom 0.203: v3.44,74.61 v8.84,74.61 | v17.25,73.65 17.25,69.68 17.57,69.37 17.57,65.08 v16.78,64.29
MOSI_1  (via drill 0.38 pad 0.76)
  Top 0.203: J9_1.4 34.24,72.86 v32.97,71.59 | v32.97,62.86 30.91,62.86 IC4_1.15
  Bottom 0.203: v32.97,71.59 v32.97,62.86
MOSI_2  (via drill 0.38 pad 0.76)
  Top 0.203: IC4_2.15 17.68,62.81 v18.21,63.34 | v18.05,76.99 13.29,76.99 9,81.27 5.67,81.27 5.03,80.64 J9_2.4 | J9_2.4
  Bottom 0.203: v18.21,63.34 18.21,76.83 v18.05,76.99
N$1_1
  Top 0.203: R10_1.1 28.77,38.58 27.97,39.38 27.97,41.59 Q1_1.B
N$1_2
  Top 0.203: R10_2.1 10.36,41.53 Q1_2.B
N$2_1
  Top 0.203: R18_1.1 31.22,42.56 Q2_1.B
N$2_2
  Top 0.203: Q2_2.B 16.31,41.91 12.25,45.97 10.39,45.97 R18_2.1
N$4_1  (via drill 0.38 pad 0.76)
  Top 0.203: C5_1.1 21.11,32.49 v21.06,32.54 | v21.06,25.56 21.06,26.35 R8_1.2 | R9_1.1 20.95,29.89 v21.06,30 24.55,30 24.87,29.68 IC3_1.2 28.68,29.69 v29,29.37 | v29.48,35.08 29.48,35.99 R7_1.2
  Bottom 0.203: v21.06,32.54 v21.06,30 v21.06,25.56 | v29,29.37 29,34.6 v29.48,35.08
N$4_2  (via drill 0.38 pad 0.76)
  Top 0.203: R8_2.2 v1.06,25.88 | v0.9,32.38 0.9,31.59 C5_2.1 | R9_2.1 v1.06,29.84 1.22,29.84 1.7,30.32 5.03,30.32 5.67,29.68 IC3_2.2 | R7_2.2 v1.75,41.29
  Bottom 0.203: v1.06,25.88 v1.06,29.84 1.06,32.23 v0.9,32.38 1.06,32.38 1.06,39.9 1.75,40.59 v1.75,41.29
N$6_1  (via drill 0.38 pad 0.76)
  Top 0.203: v30.16,6.18 30.16,7.83 R16_1.2
  Bottom 0.203: J8_1.2 25.23,1.26 v30.16,6.18
N$6_2  (via drill 0.38 pad 0.76)
  Top 0.203: v9.62,6.49 9.62,7.92 R16_2.2
  Bottom 0.203: J8_2.2 4.55,1.43 v9.62,6.49
N$8_1  (via drill 0.38 pad 0.76)
  Top 0.203: R7_1.1 27.73,35.08 v28.05,34.76
  Bottom 0.203: v28.05,34.76 28.05,36.35 28.68,36.98 28.68,50.64 VR2_1.2
N$8_2  (via drill 0.38 pad 0.76)
  Top 0.203: R7_2.1 8.35,41.29 v8.52,41.46
  Bottom 0.203: v8.52,41.46 8.52,50.64 VR2_2.2
N$9_1  (via drill 0.38 pad 0.76)
  Top 0.203: v38.05,42.7 38.05,41.91 R3_1.1
  Bottom 0.203: VR1_1.2 v38.05,42.7
N$9_2  (via drill 0.38 pad 0.76)
  Top 0.203: R3_2.1 18.68,35.48 v18.63,35.53
  Bottom 0.203: v18.63,35.53 18.63,50.85 VR1_2.2
N$10_1
  Top 0.203: J1_1.2 35.02,25.07 R5_1.1
N$10_2
  Top 0.203: J1_2.2 15.22,25.07 R5_2.1
N$11_1
  Top 0.203: R8_1.1 23.27,26.51 J2_1.2
N$11_2
  Top 0.203: R8_2.1 2.95,26.67 J2_2.2
N$13_1  (via drill 0.38 pad 0.76)
  Top 0.203: IC4_1.31 23.32,58.81 24.57,60.06 v28.54,60.06 | v28.05,90.95 27.31,91.69 R11_1.1
  Bottom 0.203: v28.54,60.06 28.54,61.07 30.75,63.28 30.75,77.81 30.71,77.84 30.71,81.63 31.63,82.54 31.63,86.58 29.24,88.97 29.24,89.76 v28.05,90.95
N$13_2  (via drill 0.38 pad 0.76)
  Top 0.203: IC4_2.31 4.16,58.81 v3.88,58.53 | v4.4,88.1 5.26,88.1 R11_2.1
  Bottom 0.203: v3.88,58.53 3.88,59.08 3.21,59.74 3.21,64.42 2.43,65.2 2.43,86.13 v4.4,88.1
N$14_1
  Top 0.203: R11_1.2 28.31,93.39 30.75,90.95 VR1_1.5
N$14_2
  Top 0.203: R11_2.2 8.06,88.11 VR1_2.5
N$15_1  (via drill 0.38 pad 0.76)
  Top 0.203: IC4_1.32 21.56,58.01 v21.24,57.69 | v23.76,52.86 29.95,52.86 30.33,52.48 30.33,51.05 VR1_1.6
  Bottom 0.203: v21.24,57.69 21.64,57.69 23.13,56.19 23.13,53.48 v23.76,52.86
N$15_2  (via drill 0.38 pad 0.76)
  Top 0.203: v10.39,58.7 10.39,58.58 9.94,58.12 8.1,58.12 IC4_2.32
  Bottom 0.203: VR1_2.6 10.9,58.18 v10.39,58.7
N$16_1  (via drill 0.38 pad 0.76)
  Top 0.203: VR2_1.5 20.75,90.64 23.92,90.64 25.82,88.73 25.82,86.67 v26.46,86.03 | v27.89,61.75 28.79,61.75 29.47,61.07 30.72,61.07 IC4_1.13
  Bottom 0.203: v26.46,86.03 30,82.5 30,63.86 v27.89,61.75
N$16_2  (via drill 0.38 pad 0.76)
  Top 0.203: IC4_2.13 17.09,61.21 17.93,62.05 19.3,62.05 v19.45,61.89 | v17.92,93.69 17.7,93.69 16.78,94.61 13.81,94.61 13.18,93.97 4.23,93.97 VR2_2.5
  Bottom 0.203: v19.45,61.89 19.45,92.16 v17.92,93.69
N$17_1  (via drill 0.38 pad 0.76)
  Top 0.203: v20.5,54.03 20.85,53.68 20.85,52.6 20.62,52.83 R19_1.1
  Bottom 0.203: VR2_1.6 20.5,50.95 v20.5,54.03
N$17_2
  Top 0.203: VR2_2.6 1.22,53.49 R19_2.1
N$18_1  (via drill 0.38 pad 0.76)
  Top 0.203: R19_1.2 22.32,53.01 23.13,53.81 24.08,53.81 24.55,53.33 33.6,53.33 v34.4,52.54 | v34.4,60.35 30.91,60.35 IC4_1.12
  Bottom 0.203: v34.4,52.54 v34.4,60.35
N$18_2  (via drill 0.38 pad 0.76)
  Top 0.203: R19_2.2 3.08,53.81 6.78,53.81 7.89,52.7 17.09,52.7 v18.21,53.81 | v18.21,60.67 16.83,60.67 IC4_2.12
  Bottom 0.203: v18.21,53.81 v18.21,60.67
N$29_1  (via drill 0.38 pad 0.76)
  Top 0.203: R5_1.2 38.16,25.44 v38.21,25.4 | v38.21,32.86 C2_1.1 | R4_1.1 v38.21,28.25 37.89,28.25 37.41,27.78 34.08,27.78 33.44,28.41 IC3_1.6 | R3_1.2 36.19,41.18 v36.8,40.57
  Bottom 0.203: v38.21,25.4 v38.21,28.25 v38.21,32.86 37.73,33.33 37.73,39.68 36.85,40.57 v36.8,40.57
N$29_2  (via drill 0.38 pad 0.76)
  Top 0.203: R5_2.2 v18.36,25.56 | v18.36,32.54 18.36,31.75 C2_2.1 | R4_2.1 18.52,28.25 v18.36,28.1 14.24,28.1 13.92,28.41 IC3_2.6 | v17.09,35.87 17.09,36.4 R3_2.2
  Bottom 0.203: v18.36,25.56 v18.36,28.1 v18.36,32.54 18.36,33.02 16.94,34.45 16.94,35.72 v17.09,35.87
N$34_1  (via drill 0.38 pad 0.76)
  Top 0.203: R13_1.2 23.18,18.15 23.92,18.89 v32.65,18.89
  Bottom 0.203: v32.65,18.89 32.65,20.81 J5_1.2
N$34_2
  Top 0.203: R13_2.2 13.79,22.06 J5_2.2
N$35_1
  Top 0.203: R12_1.2 26.21,6.57 31.5,1.27 34.7,1.27 J6_1.2
N$35_2
  Top 0.203: R12_2.2 7.23,6.19 11.92,1.5 14.31,1.5 J6_2.2
N$36_1  (via drill 0.38 pad 0.76)
  Top 0.203: v27.09,16.67 29,16.67 R17_1.2
  Bottom 0.203: J7_1.2 24.71,22.86 26.94,20.64 26.94,16.83 v27.09,16.67
N$36_2
  Top 0.203: R17_2.2 6.35,19.78 4.6,21.53 4.6,22.78 J7_2.2
N$39_1  (via drill 0.38 pad 0.76)
  Top 0.203: IC4_1.18 28.56,66.2 v28.53,66.23 | v28.62,73.34 27.13,73.34 L1_1.2 | C8_1.1 28.43,70.96 v28.62,70.77
  Bottom 0.203: v28.53,66.23 28.53,70.77 | 28.53,70.77 28.53,73.25 v28.62,73.34 | v28.62,70.77 28.53,70.77
N$39_2  (via drill 0.38 pad 0.76)
  Top 0.203: IC4_2.18 14.27,66.26 14.82,66.81 16.59,66.81 v16.71,66.92 | v15.26,70.65 14.3,70.65 C8_2.1 | v15.23,73.12 13.99,73.12 L1_2.2
  Bottom 0.203: v16.71,66.92 16.71,69.2 v15.26,70.65 15.26,73.09 v15.23,73.12
Net_0  (via drill 0.38 pad 0.76)
  Top 0.508: D20.3 36.46,88.26 v37.41,89.21
  Bottom 0.508: v37.41,89.21 37.41,93.33 34.71,96.03 34.71,102.22 30.75,106.19 28.05,106.19 26.3,107.94 15.19,107.94 14.4,107.14 J10.2 J10.1
Net_43  (via drill 0.38 pad 0.76)
  Top 0.203: R18_1.2 25.61,45.79 J4_1.2 | J3_2.1 22.05,38.43 v22.13,38.51
  Bottom 0.203: v22.13,38.51 22.13,44.1 J4_1.2
Net_44  (via drill 0.38 pad 0.76)
  Top 0.508: D20.4 33.77,87.3 33.28,87.78 v33.28,91.11
  Bottom 0.508: v33.28,91.11 33.28,102.22 32.48,103.03 J10.9 J10.10
OUT1_A_1  (via drill 0.38 pad 0.76)
  Top 0.203: R13_1.1 v21.48,16.41 | v22.32,54.84 22.32,55.23 23.6,56.52 IC4_1.1
  Bottom 0.203: v21.48,16.41 19.95,17.94 19.95,45.67 22.19,47.91 22.19,54.71 v22.32,54.84
OUT1_A_2  (via drill 0.38 pad 0.76)
  Top 0.203: IC4_2.1 9.47,56.35 v8.52,55.4 | v7.8,21.98 R13_2.1
  Bottom 0.203: v8.52,55.4 8.21,55.4 7.8,54.99 v7.8,21.98
OUT1_B_1  (via drill 0.38 pad 0.76)
  Top 0.203: R12_1.1 21.96,5.98 v21.38,5.4 | v20.43,59.68 22.19,59.68 IC4_1.30
  Bottom 0.203: v21.38,5.4 21.38,13.97 19.32,16.03 19.32,45.72 21.7,48.1 21.7,54.28 20.43,55.55 v20.43,59.68
OUT1_B_2  (via drill 0.38 pad 0.76)
  Top 0.203: R12_2.1 2.33,7.04 v2.02,7.35 | v1.7,59.84 7.75,59.84 IC4_2.30
  Bottom 0.203: v2.02,7.35 2.02,39.52 2.96,40.46 2.96,43.49 2.84,43.49 2.02,44.31 2.02,48 2.22,48.2 2.22,58.37 1.7,58.89 v1.7,59.84
OUT2_A_1  (via drill 0.38 pad 0.76)
  Top 0.203: R17_1.1 30.86,15.76 v30.9,15.71 | v32.33,58.89 30.94,58.89 IC4_1.10
  Bottom 0.203: v30.9,15.71 30.9,47.14 31.56,47.8 31.56,58.12 v32.33,58.89
OUT2_A_2  (via drill 0.38 pad 0.76)
  Top 0.203: R17_2.1 v16.34,19.78 | v18.97,58.99 16.75,58.99 IC4_2.10
  Bottom 0.203: v16.34,19.78 16.34,26.57 14.96,27.96 14.96,29.08 16.06,30.19 16.06,41.31 17.5,42.75 17.5,52 18.97,53.46 v18.97,58.99
OUT2_B_1  (via drill 0.38 pad 0.76)
  Top 0.203: R16_1.1 31.97,6.71 v32.17,6.51 | v32.65,57.62 31.24,57.62 IC4_1.9
  Bottom 0.203: v32.17,6.51 32.17,16.51 31.54,17.14 31.54,45.72 31.92,46.1 31.92,52.33 32.65,53.06 v32.65,57.62
OUT2_B_2  (via drill 0.38 pad 0.76)
  Top 0.203: R16_2.1 11.65,8.78 v12.25,9.38 | v16.86,57.37 16.86,57.72 IC4_2.9
  Bottom 0.203: v12.25,9.38 12.25,16.9 12.97,17.62 12.97,38.99 16.01,42.03 16.01,47.5 14.93,48.57 14.93,52.6 16.35,54.02 16.35,57.37 v16.86,57.37
P1_CV_1  (via drill 0.38 pad 0.76)
  Top 0.203: 35.68,29.21 34.08,29.21 33.6,29.69 IC3_1.7 30.66,29.69 28.56,31.79 24.29,31.79 22.64,33.43 21.57,33.43 v21.3,33.7 | 35.68,29.21 R4_1.2 | 35.68,29.21 v35.68,28.73 | v36.43,30.98 36.32,30.98 36.32,31.56 C2_1.2 | v23.64,66.33 23.64,65.22 IC4_1.24
  Bottom 0.203: v35.68,28.73 35.98,28.73 36.62,29.37 36.62,30.79 v36.43,30.98 | v21.3,33.7 21.3,45.18 24.43,48.31 24.43,53.94 23.81,54.55 23.81,66.15 v23.64,66.33
P1_CV_2  (via drill 0.38 pad 0.76)
  Top 0.203: R4_2.2 15.99,29.05 v15.82,28.89 15.03,29.69 IC3_2.7 11.66,29.69 9.18,32.16 7.62,32.16 v6.53,33.26 | v16.94,32.7 16.94,31.59 C2_2.2 | v5.32,65.6 8.97,65.6 IC4_2.24
  Bottom 0.203: v15.82,28.89 15.98,28.89 16.78,29.68 16.78,32.54 v16.94,32.7 | v6.53,33.26 6.53,34.26 6.89,34.62 6.89,46.56 5.19,48.26 5.19,65.47 v5.32,65.6
P2_CV_1  (via drill 0.38 pad 0.76)
  Top 0.203: IC3_1.1 24.07,30.96 23.6,31.43 C5_1.2 22.81,32.22 v22.49,32.54 | v23.6,28.41 23.29,28.41 R9_1.2 | IC4_1.23 24.56,67.14 v24.62,67.2
  Bottom 0.203: v23.6,28.41 22.49,29.52 v22.49,32.54 22.88,32.93 22.88,41.59 23.44,42.16 23.44,42.7 23.92,43.17 24.46,43.17 26.83,45.54 26.83,52.49 24.62,54.7 v24.62,67.2
P2_CV_2  (via drill 0.38 pad 0.76)
  Top 0.203: IC3_2.1 5.66,30.96 v5.58,31.04 5.19,31.43 v3.72,31.43 2.76,31.43 C5_2.2 | v3.76,28.41 3.4,28.41 R9_2.2 | v10.26,67 10.26,65.12 IC4_2.23
  Bottom 0.203: v3.72,31.43 3.56,31.43 3.12,30.98 3.12,29.06 v3.76,28.41 | v5.58,31.04 5.58,31.14 7.38,32.94 7.38,60.92 10.28,63.82 10.28,66.97 v10.26,67
REF_-5  (via drill 0.38 pad 0.76)
  Top 0.203: VR1_1.1 35.51,49.62 34.31,48.41 26.62,48.41 25.98,49.05 25.98,50.95 VR2_1.1 25.82,49.09 25.15,48.41 17.25,48.41 15.98,49.68 VR1_2.1 15.98,49.52 14.87,48.41 7.57,48.41 6.3,49.68 VR2_2.1 | IC1.2 32.06,78.89 R1.2 v32.38,79.84 36.94,79.84 37.84,78.94 R2.2
  Bottom 0.203: v32.38,79.84 32.38,75.83 35.51,72.7 VR1_1.1 | VR1_1.1
RESET_1  (via drill 0.38 pad 0.76)
  Top 0.203: R14_1.1 21.19,72.35 v20.46,71.62 | v20.46,61.07 21.2,60.33 22.19,60.33 IC4_1.29 | v20.46,69.61 28.6,69.61 29.79,68.41 29.79,66.98 30.9,65.87 36.3,65.87 36.78,66.35 J9_1.5
  Bottom 0.203: v20.46,71.62 v20.46,69.61 v20.46,61.07
RESET_2  (via drill 0.38 pad 0.76)
  Top 0.203: IC4_2.29 4.9,60.41 4.66,60.65 v4.02,60.65 | v3.82,66.84 3.82,67.44 R14_2.1 4.03,68.69 4.71,69.37 7.25,69.37 7.57,69.68 J9_2.5
  Bottom 0.203: v4.02,60.65 4.02,66.64 v3.82,66.84
S$1  (via drill 0.38 pad 0.76)
  other vias: 23.28,49.05
SCK_1  (via drill 0.38 pad 0.76)
  Top 0.203: J9_1.3 v34.24,66.67 | v34.24,65.08 29.38,65.08 IC4_1.17
  Bottom 0.203: v34.24,66.67 v34.24,65.08
SCK_2  (via drill 0.38 pad 0.76)
  Top 0.203: J9_2.3 | J9_2.3 v5.98,73.49 | v9.79,71.27 9.79,70.48 10.9,69.37 14.87,69.37 v15.67,68.57 | v15.67,65.4 15.37,65.4 IC4_2.17
  Bottom 0.203: v5.98,73.49 7.57,73.49 v9.79,71.27 | v15.67,68.57 v15.67,65.4
SW1_1  (via drill 0.38 pad 0.76)
  Top 0.203: SW1_1.3 SW1_1.4 | SW1_1.4 | SW1_1.4 30.76,95.53 29.13,97.15 23.7,97.15 v23.37,96.83 | v21.15,62.81 IC4_1.26
  Bottom 0.203: v23.37,96.83 23.37,67.68 22.82,67.13 22.82,64.48 v21.15,62.81
SW1_2  (via drill 0.38 pad 0.76)
  Top 0.203: SW1_2.3 SW1_2.4 10.12,96.87 v3.55,96.87 | IC4_2.26 v2.48,62.81
  Bottom 0.203: v2.48,62.81 2.48,64.3 1.92,64.85 1.92,88.18 3.5,89.76 3.5,96.82 v3.55,96.87
SW2_1  (via drill 0.38 pad 0.76)
  Top 0.203: SW2_1.3 SW2_1.4 | IC4_1.25 22.27,64.8 v22.16,64.91
  Bottom 0.203: v22.16,64.91 22.16,94.67 SW2_1.4
SW2_2  (via drill 0.38 pad 0.76)
  Top 0.203: SW2_2.3 SW2_2.4 | SW2_2.4 | IC4_2.25 1.54,63.61 v1.51,63.65
  Bottom 0.203: v1.51,63.65 1.51,88.73 2.81,90.04 2.81,94.5 SW2_2.4
VCC
  Top 0.508: D20.1 32.81,81.59 30.56,83.83 C9.+ 23.71,83.83 IC2.3
VEE  (via drill 0.38 pad 0.76)
  Top 0.203: R1.1 | R1.1 R2.1 v35.35,78.57 | v35.03,82.22 35.67,81.59 D20.2
  Bottom 0.203: v35.35,78.57 35.03,78.57 v35.03,82.22

## Text on the board
Top: JM
tPlace: EITHER WAY | 2x branches by Olivier Gillet | twiigs | right | left | twiigs | CC-BY-SA-3.0 | TWiiGS